# EAGLE board Tilt_Force_Sensor (EAGLE 9.7.0)

Size 167.84 x 105.23 mm. Coordinates in mm from the lower left corner, seen from the top.
Outline: 0,0 167.84,0 167.84,105.23 0,105.23 0,0
Copper layers (1*16): Top 0.035mm / dielectric 1.5mm / Bottom 0.035mm
Design rules "default": minimum track width 6mil, minimum drill 0.35mm, track to track 6mil, track to pad 6mil, pad to pad 6mil, via to via 6mil, smd to smd 6mil, copper to edge 40mil, drill to drill 6mil, minimum pad ring 10mil, minimum via ring 8mil, stop-mask expansion 4mil, vias tented up to drill 0mil, thermal gap 10mil

## Footprints (pad centres in the part's own frame; a part is rotated, then mirrored left to right if it is on the bottom)
LED-RGB-5MM = drill 0.9: B 0.635,0.635; C -0.635,-0.635; G 1.905,-0.635; R -1.905,0.635
MOTOR = drill 1.118 pad 3.15 octagon: + 2.54,0; - -2.54,0
RESAD1016W63L850D250B = drill 0.83 pad 1.43: 1 -5.08,0; 2 5.08,0
1X02 = drill 1.016 long: 1 -1.27,0; 2 1.27,0
SWITCH-MOMENTARY-PTH-6.5MM = drill 1.016 pad 1.88: 1 -3.251,2.261; 2 3.251,2.261; 3 -3.251,-2.261; 4 3.251,-2.261
SW-200D = drill 0.85 pad 1.45: 1 -7.15,0; 2 7.15,0
ARDUINO-UNO-R3-SHIELD = drill 1.016 pad 1.88: 3.3V 24.13,-2.54; 5V 24.13,0; A0 24.13,12.7; A1 24.13,15.24; A2 24.13,17.78; A3 24.13,20.32; A4 24.13,22.86; A5 24.13,25.4; AREF -24.13,-13.97; D2 -24.13,20.32; D3 -24.13,17.78; D4 -24.13,15.24; D5 -24.13,12.7; D6 -24.13,10.16; D7 -24.13,7.62; D8 -24.13,3.81; D9 -24.13,1.27; D10 -24.13,-1.27; D11 -24.13,-3.81; D12 -24.13,-6.35; D13 -24.13,-8.89; GND@0 24.13,2.54; GND@1 24.13,5.08; GND@2 -24.13,-11.43; IOREF 24.13,-7.62; NC 24.13,-10.16; RES 24.13,-5.08; RX -24.13,25.4; SCL -24.13,-19.05; SDA -24.13,-16.51; TX -24.13,22.86; VIN 24.13,7.62
LCD-I2C = drill 1.016 long: 1 -19.05,-5.08; 2 -19.05,-7.62; 3 -19.05,-10.16; 4 -19.05,-12.7

## Placement (x,y rotation side)
D7  LED-RGBRCBG-PTH  [LED-RGB-5MM]  157.7,81.06 0 top
M2  MOTOR_HDR  [MOTOR]  141.19,68.36 0 top
R1  1k  [RESAD1016W63L850D250B]  95.47,75.98 90 top
R2  1k  [RESAD1016W63L850D250B]  115.79,58.2 90 top
R10  1k  [RESAD1016W63L850D250B]  125.95,58.2 90 top
R11  1k  [RESAD1016W63L850D250B]  105.63,58.2 90 top
R16  FORCE-SENSOR  [1X02]  96.74,86.14 0 top
R17  1k  [RESAD1016W63L850D250B]  153.89,73.44 90 top
R18  1k  [RESAD1016W63L850D250B]  158.97,73.44 90 top
R19  1k  [RESAD1016W63L850D250B]  161.51,73.44 90 top
S2  SWITCH_MOMENTARY  [SWITCH-MOMENTARY-PTH-6.5MM]  113.25,84.87 90 top
TILT2  TILT  [SW-200D]  99.28,70.9 0 top
TILT3  TILT  [SW-200D]  119.6,70.9 0 top
U3  ARDUINO-UNO-R3-SHIELD  [ARDUINO-UNO-R3-SHIELD]  47.88,75.39 270 top
ULCD_1  LCD-16X2-I2CSUNFOUNDER-IIC  [LCD-I2C]  108.92,36.63 0 top

## Library data of the parts
D7 M2 R1 R2 R10 R11 R16-R19 S2 TILT2 TILT3 U3 ULCD_1 = Tinkercad

## Nets
D7_B: D7.B R18.2
D7_G: D7.G R19.2
D7_R: D7.R R17.2
S2_3: R2.2 S2.3 S2.4
U3_5V: R16.2 S2.1 S2.2 TILT2.1 TILT3.1 U3.5V ULCD_1.2
U3_A0: R1.2 R16.1 U3.A0
U3_D4: R11.2 TILT2.2 U3.D4
U3_D5: R10.2 TILT3.2 U3.D5
U3_D6: M2.+ U3.D6
U3_D9: R19.1 U3.D9
U3_D10: R18.1 U3.D10
U3_D11: R17.1 U3.D11
U3_GND: D7.C M2.- R1.1 R2.1 R10.1 R11.1 U3.GND@0 U3.GND@1 U3.GND@2 ULCD_1.1
U3_SCL: U3.SCL ULCD_1.4
U3_SDA: U3.SDA ULCD_1.3

## Tracks (layer width: path | path; a pad name or v marks a point on that pad's centre or on a via)
D7_B  (1 unrouted)
D7_G  (1 unrouted)
D7_R  (1 unrouted)
S2_3  (2 unrouted)
U3_5V  (6 unrouted)
U3_A0  (2 unrouted)
U3_D4  (2 unrouted)
U3_D5  (2 unrouted)
U3_D6  (1 unrouted)
U3_D9  (1 unrouted)
U3_D10  (1 unrouted)
U3_D11  (1 unrouted)
U3_GND  (9 unrouted)
U3_SCL  (1 unrouted)
U3_SDA  (1 unrouted)